# Altium PCB energy_harvesting_board.PcbDoc
Units mm, origin at the board's own origin, x right, y up, seen from the top; angles counter-clockwise.
Board outline 152.4 x 101.6 mm, 18 copper layers (F.Cu, F.Mask, B.Cu, B.Mask, F.SilkS, B.SilkS, F.Adhes, B.Adhes, F.Paste, B.Paste, Dwgs.User, Cmts.User, Eco1.User, Eco2.User, Edge.Cuts, Margin, B.CrtYd, F.CrtYd); 38 components, 22 nets, 126 pads, 53 vias.
Unrouted connection lines stored in the file: 67.
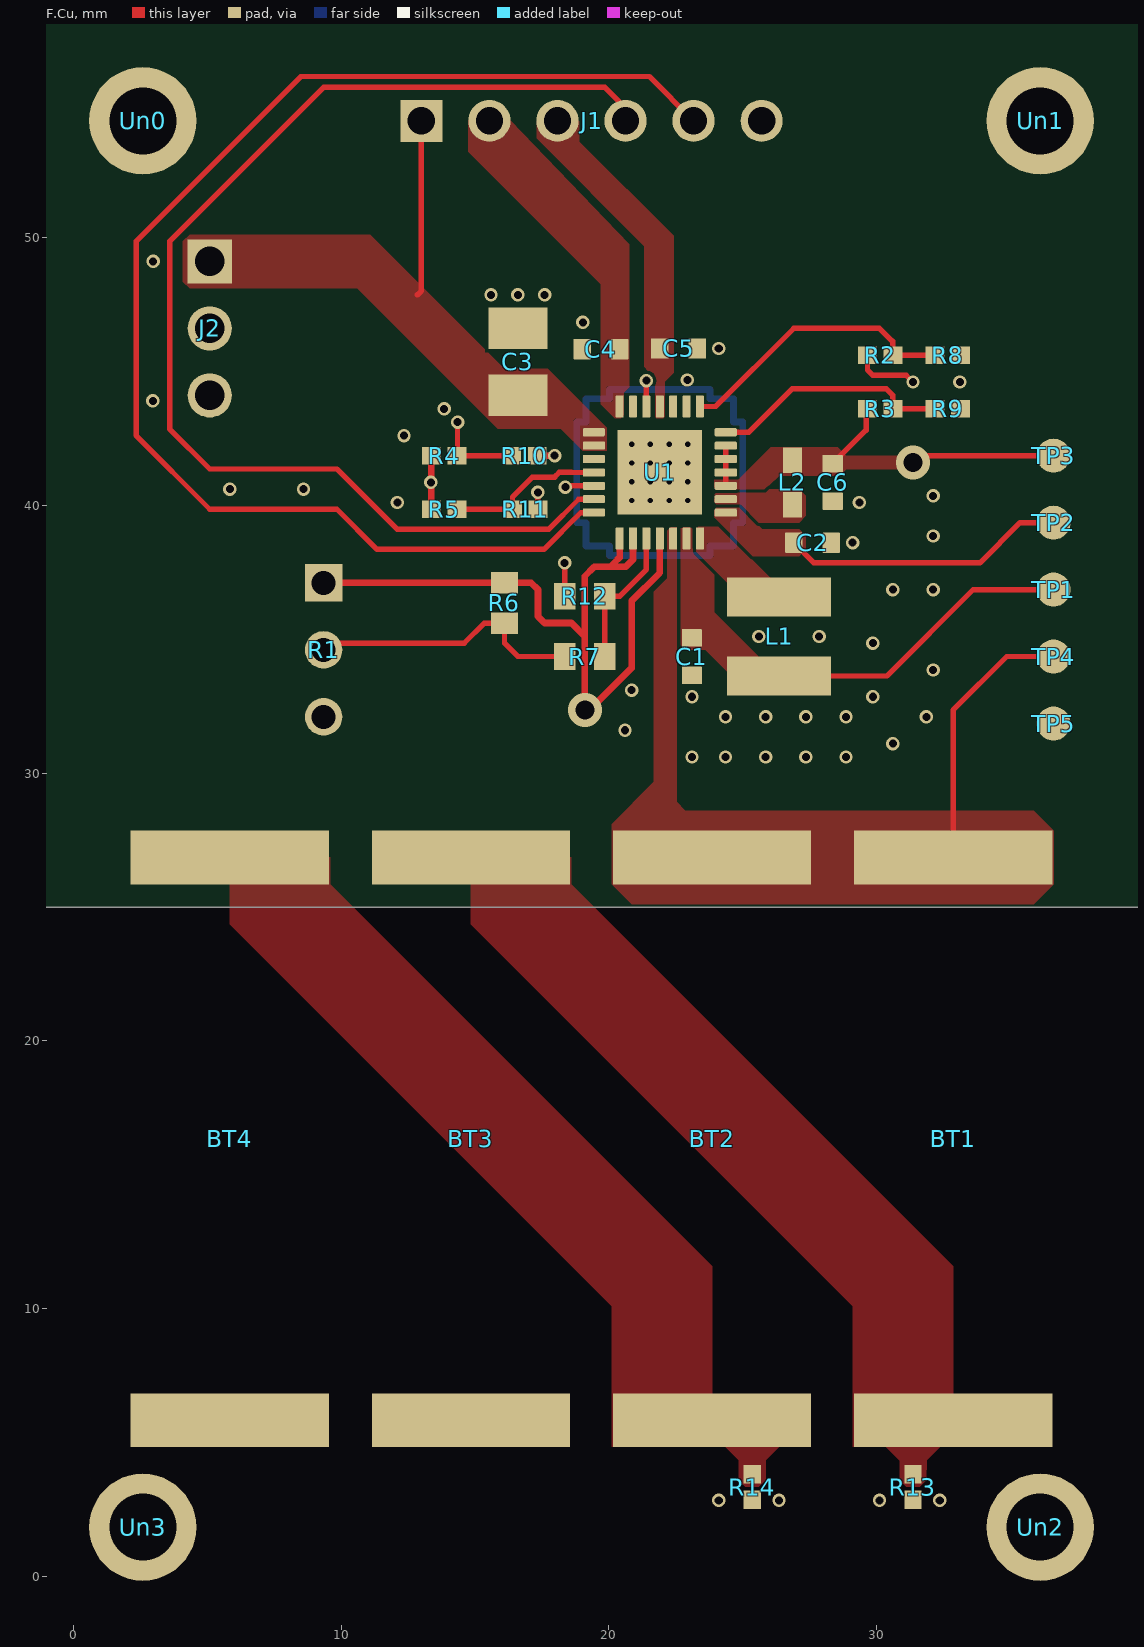
[diagram p0: F.Cu view]
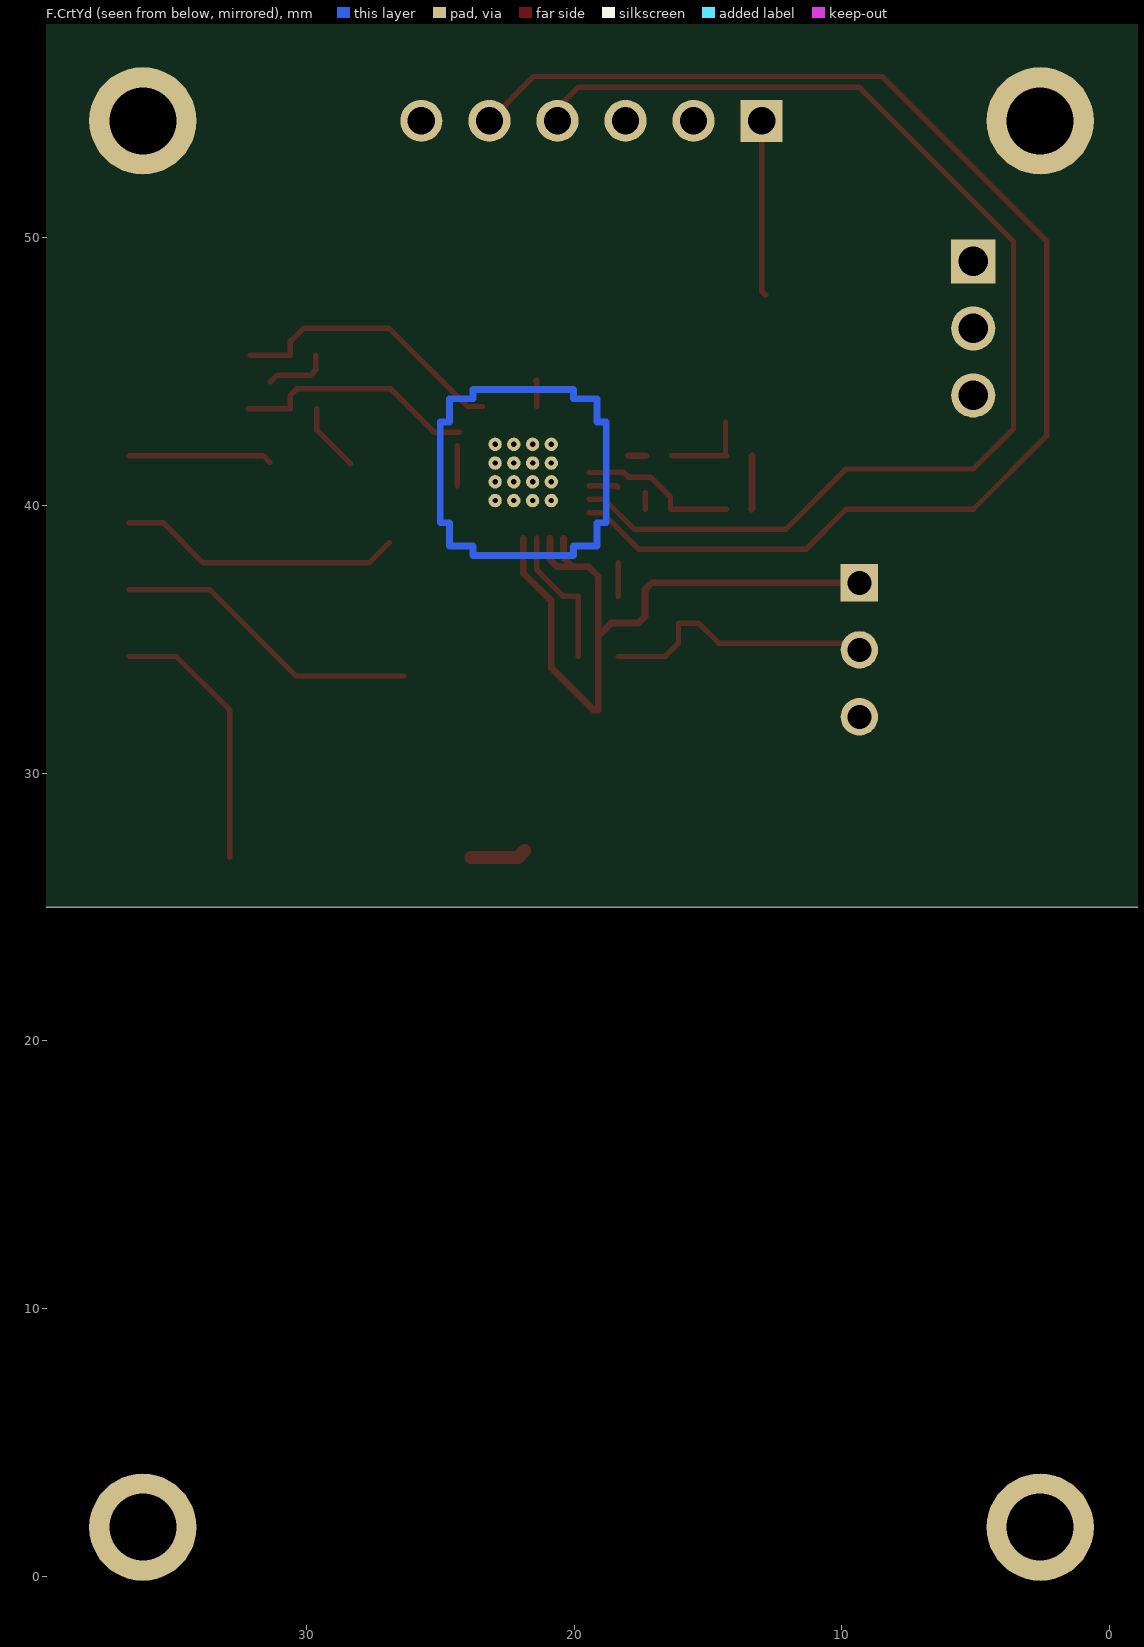
[diagram p1: F.CrtYd view, seen from below]
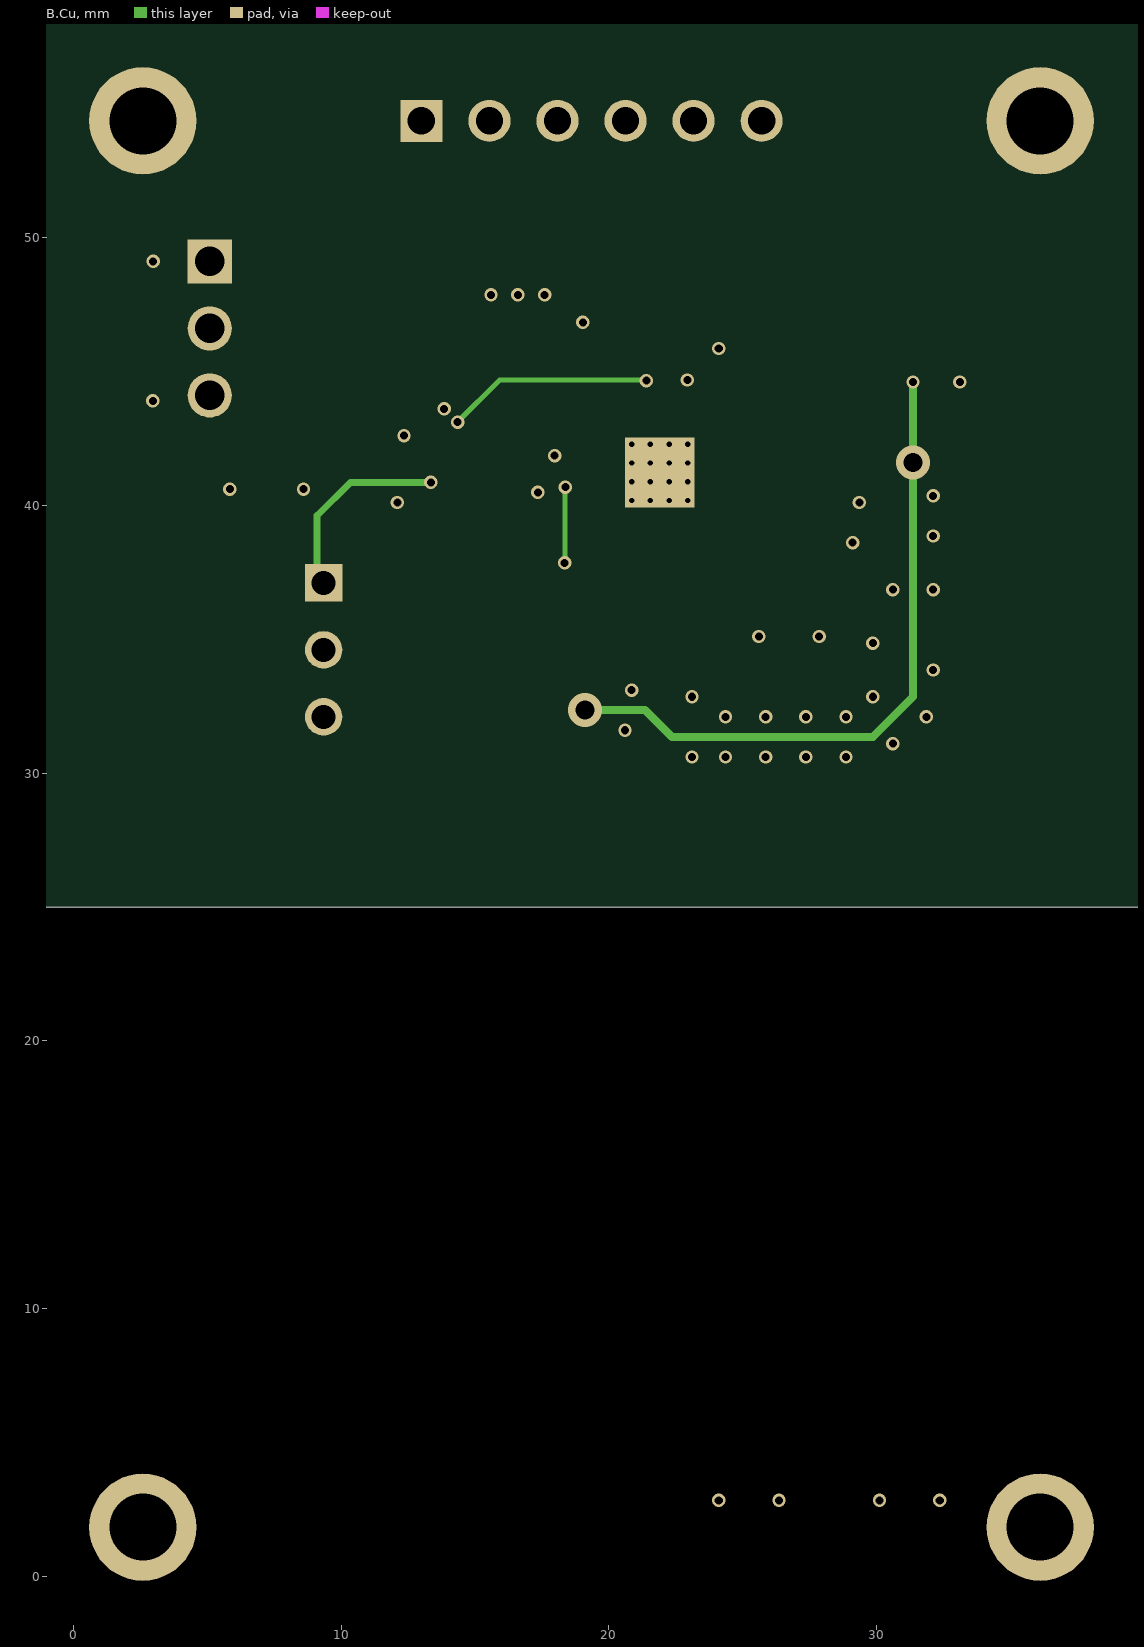
[diagram p2: B.Cu]
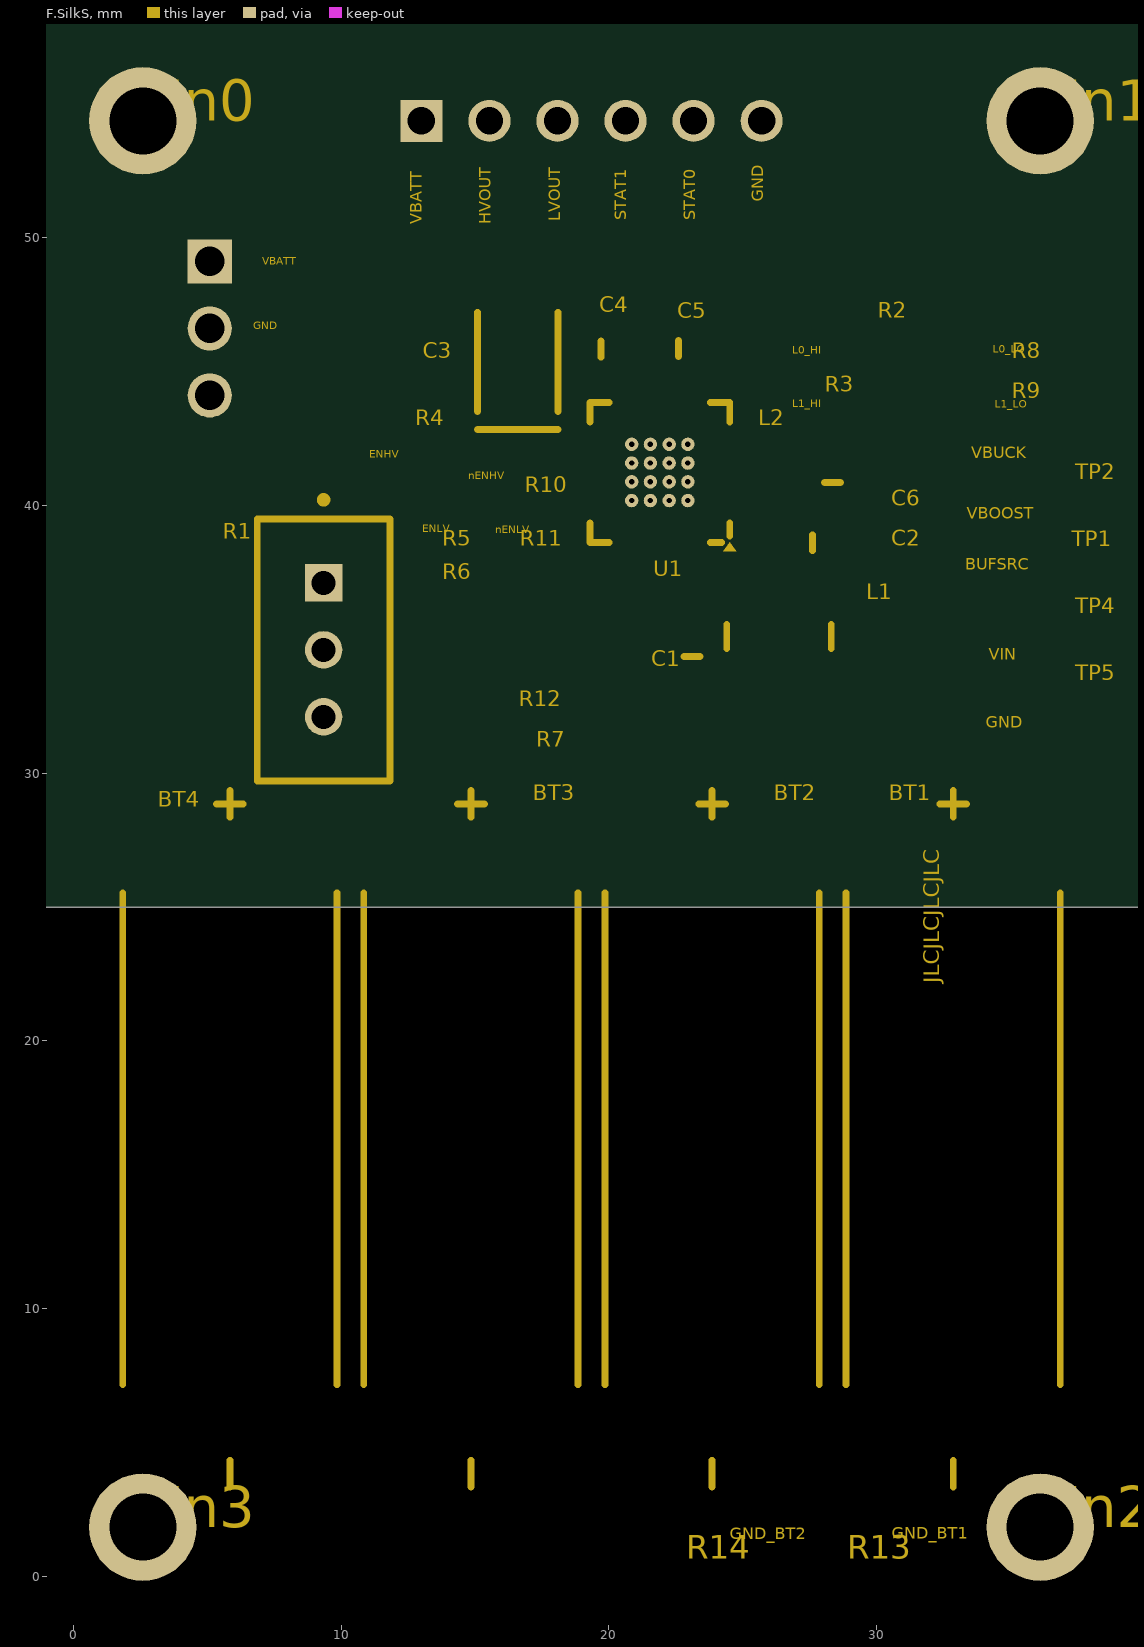
[diagram p3: F.SilkS]
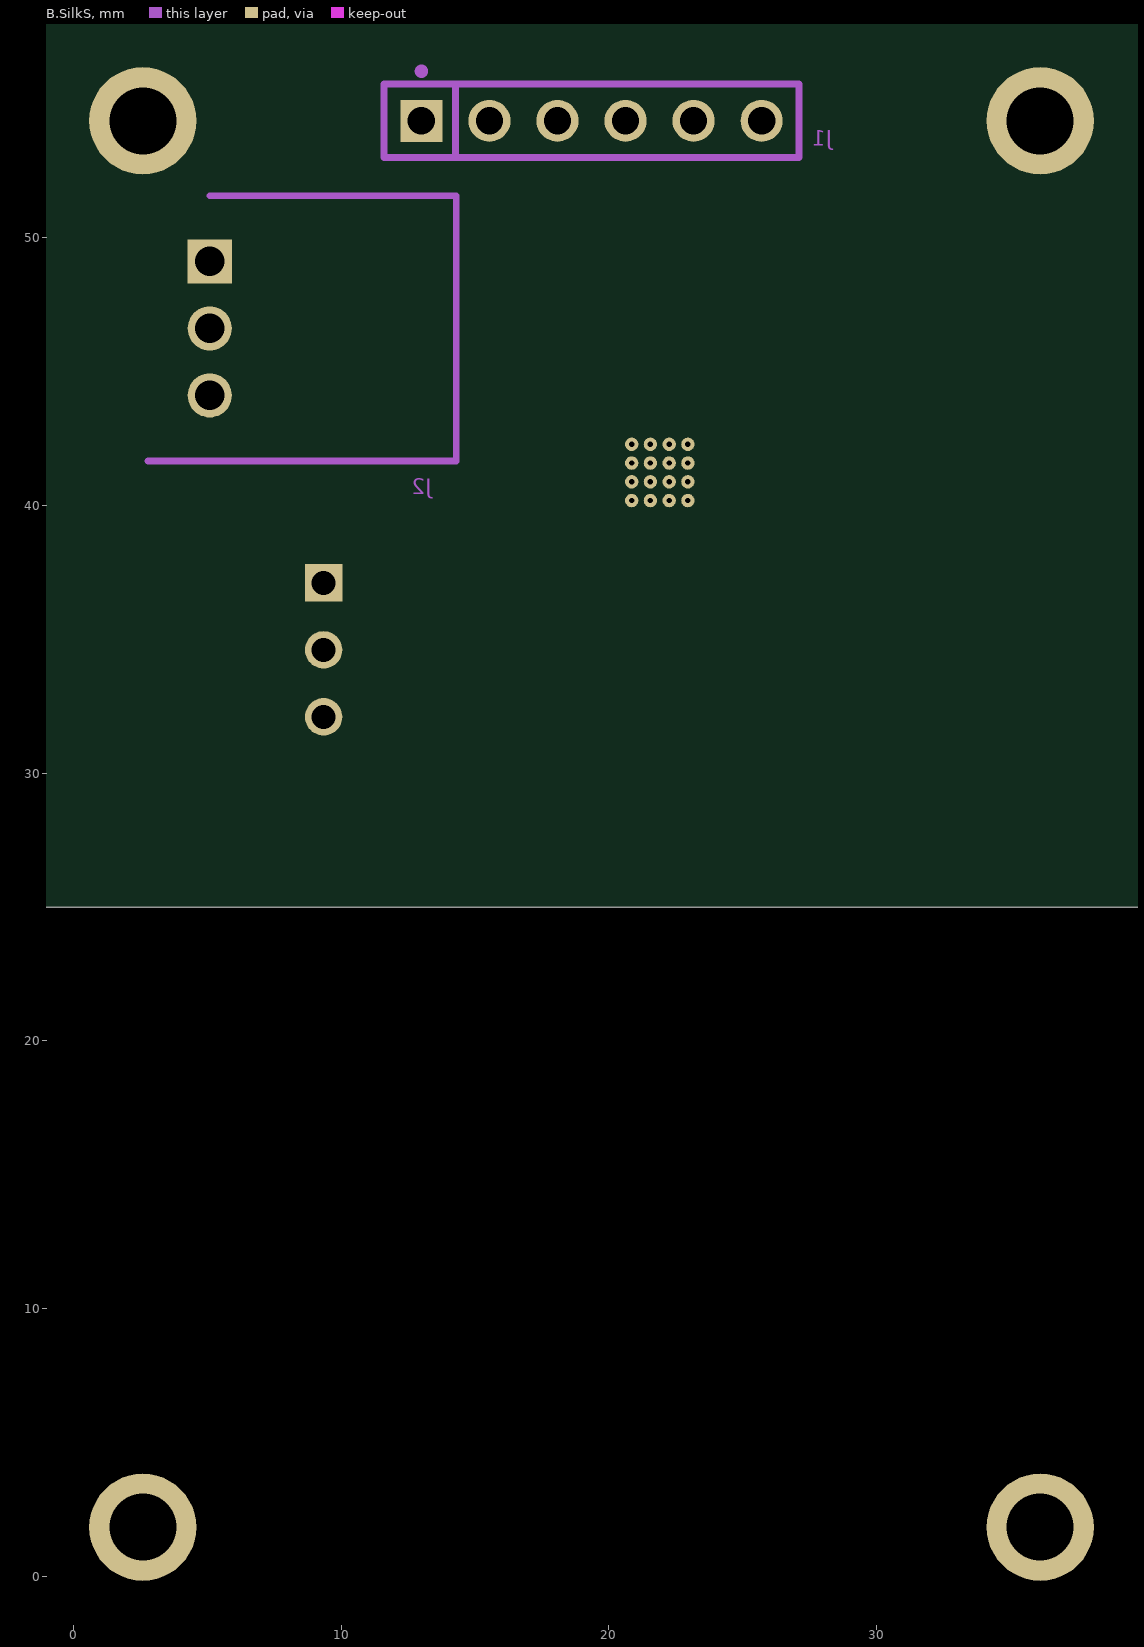
[diagram p4: B.SilkS]
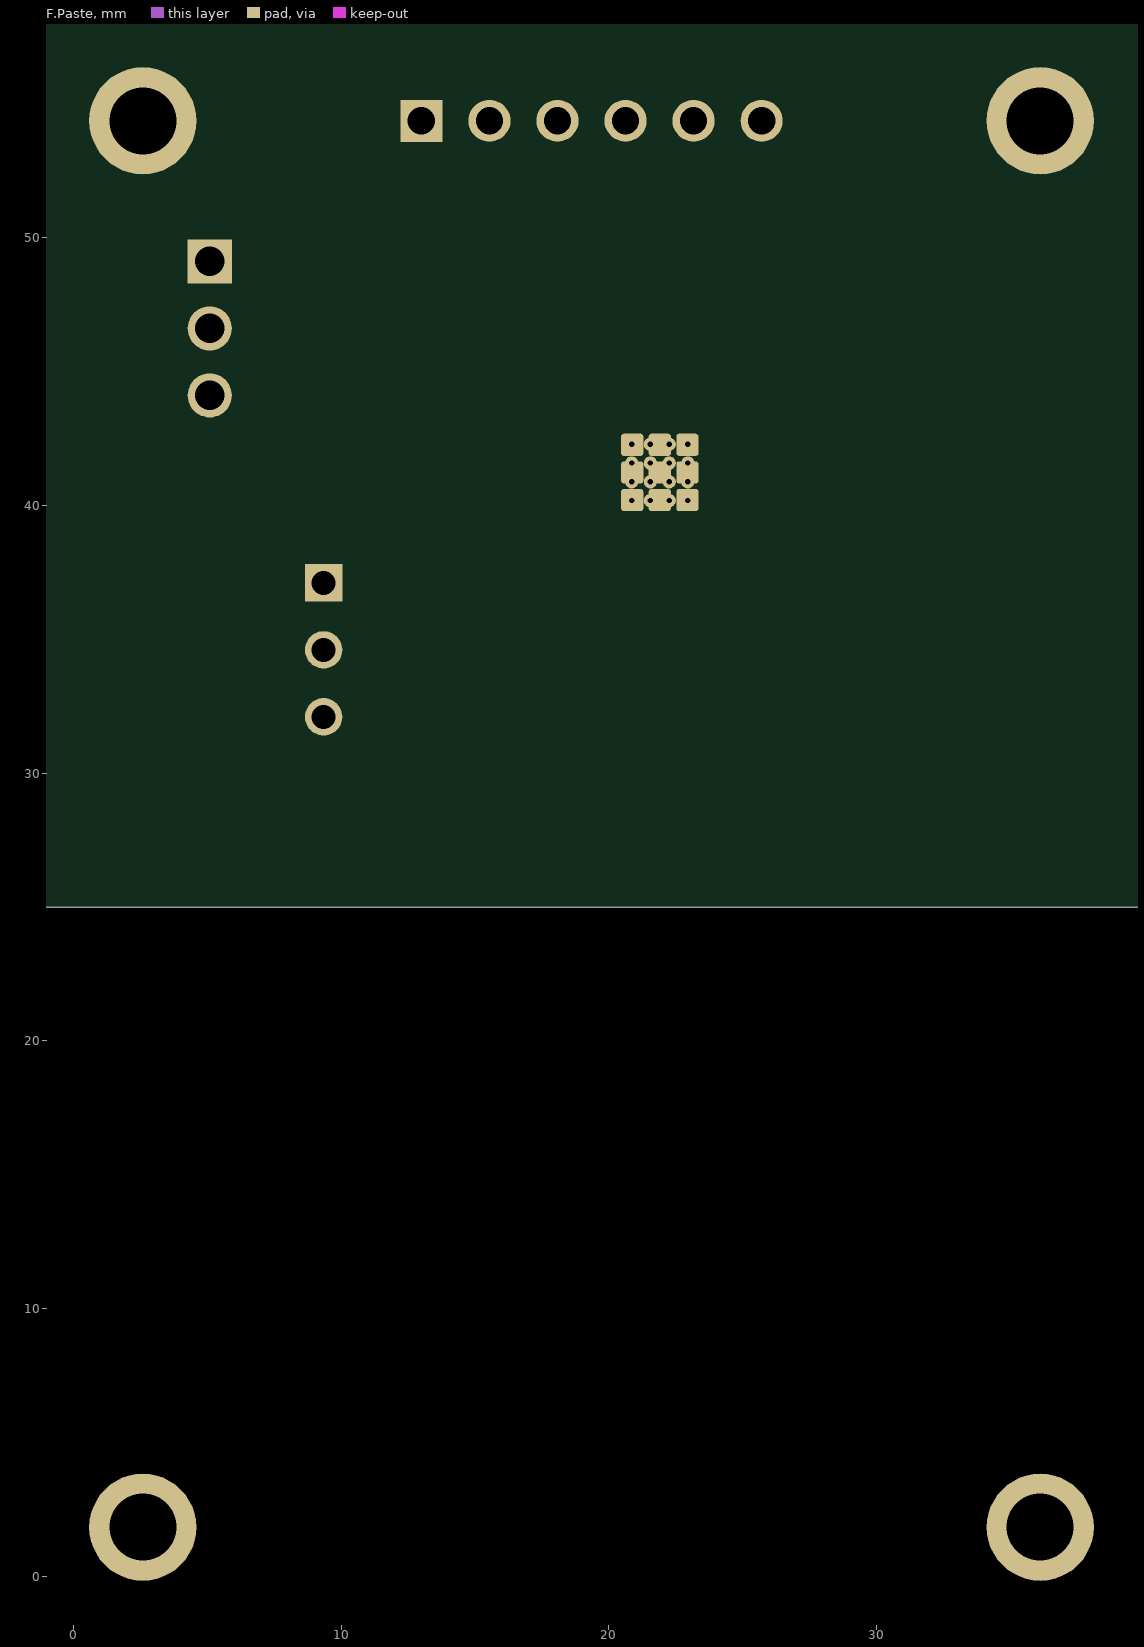
[diagram p5: F.Paste]
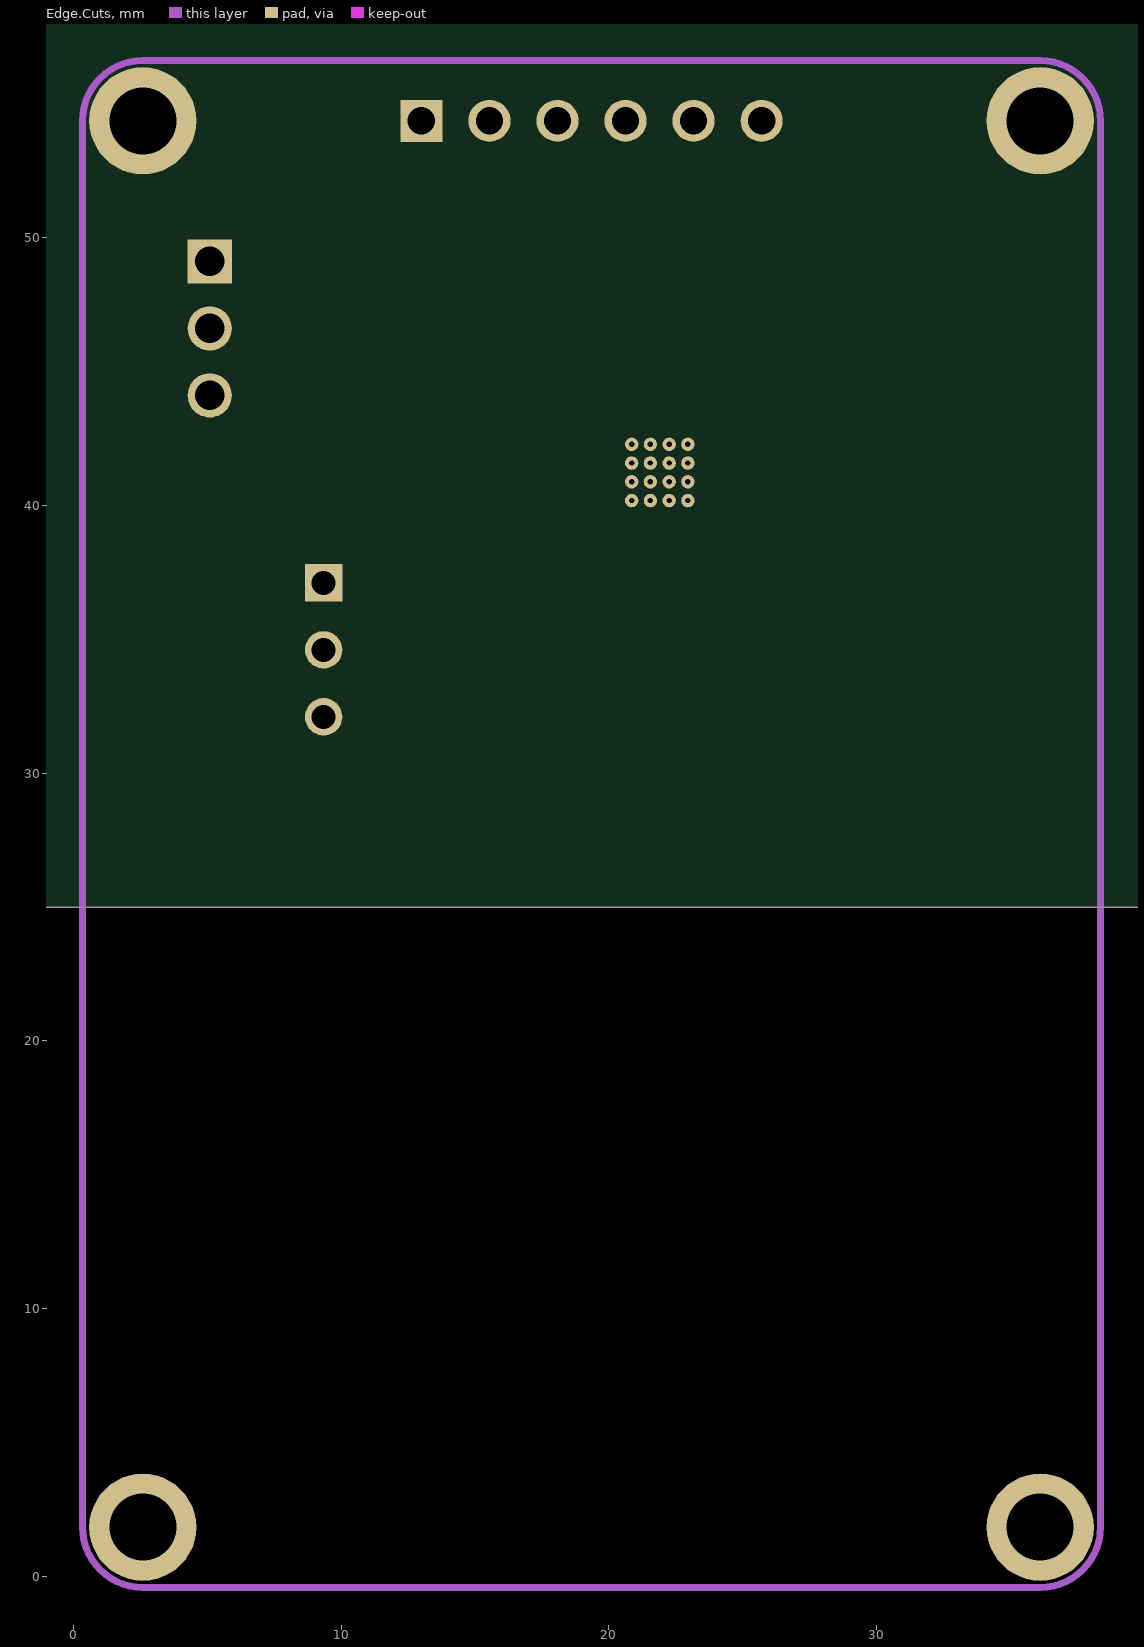
[diagram p6: Edge.Cuts]

## Layer stack, top to bottom
Top Solder: solder mask 0.0102, Solder Resist, Dk 3.5
F.Cu: signal copper 0.0356
Dielectric 1: dielectric 0.32, FR-4, Dk 4.8
F.Mask: signal copper 0.0356
Dielectric2: dielectric 0.32, FR-4, Dk 4.8
B.Cu: signal copper 0.0356
Dielectric3: dielectric 0.32, FR-4, Dk 4.8
B.Mask: signal copper 0.0356
Dielectric4: dielectric 0.32, FR-4, Dk 4.8
F.SilkS: signal copper 0.0356
Dielectric5: dielectric 0.32, FR-4, Dk 4.8
B.SilkS: signal copper 0.0356
Dielectric6: dielectric 0.32, FR-4, Dk 4.8
F.Adhes: signal copper 0.0356
Dielectric7: dielectric 0.32, FR-4, Dk 4.8
B.Adhes: signal copper 0.0356
Dielectric8: dielectric 0.32, FR-4, Dk 4.8
F.Paste: signal copper 0.0356
Dielectric9: dielectric 0.32, FR-4, Dk 4.8
B.Paste: signal copper 0.0356
Dielectric10: dielectric 0.32, FR-4, Dk 4.8
Dwgs.User: signal copper 0.0356
Dielectric11: dielectric 0.32, FR-4, Dk 4.8
Cmts.User: signal copper 0.0356
Dielectric12: dielectric 0.32, FR-4, Dk 4.8
Eco1.User: signal copper 0.0356
Dielectric13: dielectric 0.32, FR-4, Dk 4.8
Eco2.User: signal copper 0.0356
Dielectric14: dielectric 0.32, FR-4, Dk 4.8
Edge.Cuts: signal copper 0.0356
Dielectric15: dielectric 0.32, FR-4, Dk 4.8
Margin: signal copper 0.0356
Dielectric16: dielectric 0.32, FR-4, Dk 4.8
B.CrtYd: signal copper 0.0356
Dielectric17: dielectric 0.32, FR-4, Dk 4.8
F.CrtYd: signal copper 0.0356
Bottom Solder: solder mask 0.0102, Solder Resist, Dk 3.5

## Board outline
-103.751,25 48.649,25 48.649,126.6 -103.751,126.6

## Design rules (kind name [scope] priority, off if disabled: settings)
Clearance "Clearence 0.127_Polygon" [InNamedPolygon('F.Cu-NetC1_1') OR InNamedPolygon('F.Cu-NetBT2_N') OR InNamedPolygon('F.Cu-NetBT1_N') OR InNamedPolygon('F.Cu-NetL1_1') OR InNamedPolygon('F.Cu-NetBT2_N-1') OR InNamedPolygon('F.Cu-NetC2_1') OR InNamedPolygon('F.Cu-V_IN') OR InNamedPolygon('F.Cu-NetL2_1') OR InNamedPolygon('F.Cu-LVOUT') OR InNamedPolygon('F.Cu-VBATT') OR InNamedPolygon('F.Cu-VBUCK') OR InNamedPolygon('F.Cu-GND') OR InNamedPolygon('F.Cu-HVOUT') OR InNamedPolygon('F.Cu-NetBT1_N-1') OR InNamedPolygon('F.Cu-V_IN-1') OR InNamedPolygon('B.Cu-GND')] p1: gap=0.127 ignorepadtopadclearanceinfootprint=FALSE
Clearance "Clearence 0.127_PadClass" [InPadClass('Pad Class Clearance 0.127')] p2: gap=0.127 ignorepadtopadclearanceinfootprint=FALSE
MinimumSolderMaskSliver [All] p1: minsoldermaskwidth=0
PolygonConnect Polygon_B.Cu-GND_ConnectDirect [IsNamedPolygon('B.Cu-GND') vs IsVia] p1: connectstyle=Direct reliefconductorwidth=0.254 reliefentries=4 polygonreliefangle="90 Angle" airgapwidth=0.254
PolygonConnect Polygon_B.Cu-GND_ConnectRelief45 [IsNamedPolygon('B.Cu-GND') vs (IsThruPin or IsSMTPin) and (PadShape_AllLayers = 'Round')] p2: connectstyle=Relief reliefconductorwidth=0.254 reliefentries=4 polygonreliefangle="45 Angle" airgapwidth=0.254
PolygonConnect Polygon_B.Cu-GND_ConnectRelief90 [IsNamedPolygon('B.Cu-GND') vs (IsThruPin or IsSMTPin) and (PadShape_AllLayers <> 'Round')] p3: connectstyle=Relief reliefconductorwidth=0.254 reliefentries=4 polygonreliefangle="90 Angle" airgapwidth=0.254
PolygonConnect Polygon_F.Cu-V_IN-1_ConnectDirect [IsNamedPolygon('F.Cu-V_IN-1')] p4: connectstyle=Direct reliefconductorwidth=0.254 reliefentries=4 polygonreliefangle="90 Angle" airgapwidth=0.254
PolygonConnect Polygon_F.Cu-NetBT1_N-1_ConnectDirect [IsNamedPolygon('F.Cu-NetBT1_N-1')] p5: connectstyle=Direct reliefconductorwidth=0.254 reliefentries=4 polygonreliefangle="90 Angle" airgapwidth=0.254
PolygonConnect Polygon_F.Cu-HVOUT_ConnectDirect [IsNamedPolygon('F.Cu-HVOUT')] p6: connectstyle=Direct reliefconductorwidth=0.254 reliefentries=4 polygonreliefangle="90 Angle" airgapwidth=0.254
PolygonConnect Polygon_F.Cu-GND_ConnectDirect [IsNamedPolygon('F.Cu-GND') vs IsVia] p7: connectstyle=Direct reliefconductorwidth=0.254 reliefentries=4 polygonreliefangle="90 Angle" airgapwidth=0.254
PolygonConnect Polygon_F.Cu-GND_ConnectRelief45 [IsNamedPolygon('F.Cu-GND') vs (IsThruPin or IsSMTPin) and (PadShape_AllLayers = 'Round')] p8: connectstyle=Relief reliefconductorwidth=0.254 reliefentries=4 polygonreliefangle="45 Angle" airgapwidth=0.254
PolygonConnect Polygon_F.Cu-GND_ConnectRelief90 [IsNamedPolygon('F.Cu-GND') vs (IsThruPin or IsSMTPin) and (PadShape_AllLayers <> 'Round')] p9: connectstyle=Relief reliefconductorwidth=0.254 reliefentries=4 polygonreliefangle="90 Angle" airgapwidth=0.254
PolygonConnect Polygon_F.Cu-VBUCK_ConnectDirect [IsNamedPolygon('F.Cu-VBUCK')] p10: connectstyle=Direct reliefconductorwidth=0.254 reliefentries=4 polygonreliefangle="90 Angle" airgapwidth=0.254
PolygonConnect Polygon_F.Cu-VBATT_ConnectDirect [IsNamedPolygon('F.Cu-VBATT')] p11: connectstyle=Direct reliefconductorwidth=0.254 reliefentries=4 polygonreliefangle="90 Angle" airgapwidth=0.254
PolygonConnect Polygon_F.Cu-LVOUT_ConnectDirect [IsNamedPolygon('F.Cu-LVOUT')] p12: connectstyle=Direct reliefconductorwidth=0.254 reliefentries=4 polygonreliefangle="90 Angle" airgapwidth=0.254
PolygonConnect Polygon_F.Cu-NetL2_1_ConnectDirect [IsNamedPolygon('F.Cu-NetL2_1')] p13: connectstyle=Direct reliefconductorwidth=0.254 reliefentries=4 polygonreliefangle="90 Angle" airgapwidth=0.254
PolygonConnect Polygon_F.Cu-V_IN_ConnectDirect [IsNamedPolygon('F.Cu-V_IN')] p14: connectstyle=Direct reliefconductorwidth=0.254 reliefentries=4 polygonreliefangle="90 Angle" airgapwidth=0.254
PolygonConnect Polygon_F.Cu-NetC2_1_ConnectDirect [IsNamedPolygon('F.Cu-NetC2_1')] p15: connectstyle=Direct reliefconductorwidth=0.254 reliefentries=4 polygonreliefangle="90 Angle" airgapwidth=0.254
PolygonConnect Polygon_F.Cu-NetBT2_N-1_ConnectDirect [IsNamedPolygon('F.Cu-NetBT2_N-1')] p16: connectstyle=Direct reliefconductorwidth=0.254 reliefentries=4 polygonreliefangle="90 Angle" airgapwidth=0.254
PolygonConnect Polygon_F.Cu-NetL1_1_ConnectDirect [IsNamedPolygon('F.Cu-NetL1_1')] p17: connectstyle=Direct reliefconductorwidth=0.254 reliefentries=4 polygonreliefangle="90 Angle" airgapwidth=0.254
PolygonConnect Polygon_F.Cu-NetBT1_N_ConnectDirect [IsNamedPolygon('F.Cu-NetBT1_N')] p18: connectstyle=Direct reliefconductorwidth=0.254 reliefentries=4 polygonreliefangle="90 Angle" airgapwidth=0.254
PolygonConnect Polygon_F.Cu-NetBT2_N_ConnectDirect [IsNamedPolygon('F.Cu-NetBT2_N')] p19: connectstyle=Direct reliefconductorwidth=0.254 reliefentries=4 polygonreliefangle="90 Angle" airgapwidth=0.254
PolygonConnect Polygon_F.Cu-NetC1_1_ConnectDirect [IsNamedPolygon('F.Cu-NetC1_1')] p20: connectstyle=Direct reliefconductorwidth=0.254 reliefentries=4 polygonreliefangle="90 Angle" airgapwidth=0.254
RoutingVias [All] p1: holewidth=0.711 width=1.27 viastyle="Through Hole" minholewidth=0.711 minwidth=1.27 maxholewidth=0.711 maxwidth=1.27
SilkToSilkClearance [All] p1: silktosilkclearance=0
SilkToSolderMaskClearance [IsPad] p1: minsilkscreentomaskgap=0 clearancetoexposedcopper=TRUE
SolderMaskExpansion [All] p1: expansion=0.102 istentingtop=FALSE
Width [All] p1: maxlimit=10 minlimit=0.254 preferedwidth=0.254 midlayer1_maxwidth=0.254 midlayer3_maxwidth=0.254 midlayer9_maxwidth=0.254 midlayer11_maxwidth=0.254 midlayer13_maxwidth=0.254 midlayer15_maxwidth=0.254 midlayer17_maxwidth=0.254 midlayer19_maxwidth=0.254 midlayer21_maxwidth=0.254 midlayer23_maxwidth=0.254 midlayer27_maxwidth=0.254 midlayer29_maxwidth=0.254 minimp=50.000000 maximp=50.000000 favimp=50.000000
27 further rules are at their usual default settings.

## Classes and differential pairs
pad class "Pad Class Clearance 0.127": R1-2

## Components (designator, comment, footprint, x,y, rotation, side; value= is the part's Value field where it differs from the comment)
BT1 "Comment" SOLAR_KXOB25-14X1F-TR 32.85,16.35 r270 top value=KXOB25-05X3F-TR
BT2 "Comment" SOLAR_KXOB25-14X1F-TR 23.85,16.35 r270 top value=KXOB25-05X3F-TR
BT3 "Comment" SOLAR_KXOB25-14X1F-TR 14.85,16.35 r270 top value=KXOB25-05X3F-TR
BT4 "Comment" SOLAR_KXOB25-14X1F-TR 5.85,16.35 r270 top value=KXOB25-05X3F-TR
C1 "Comment" CAPC0603(1608)100_L 23.1,34.35 r270 top value="Capacitor 10µF +/-20% 10V 0603"
C2 "Comment" CAPC0603(1608)100_L 27.6,38.6 r0 top value="Capacitor 10µF +/-20% 10V 0603"
C3 "Comment" AVX-TAJ-B-2_L 16.6,45.35 r90 top value=TAJB106K016RNJ
C4 "Comment" CAPC0603(1608)100_L 19.7,45.825 r180 top value="Capacitor 10µF +/-20% 10V 0603"
C5 "Comment" CAPC0603(1608)100_L 22.6,45.85 r180 top value="Capacitor 10µF +/-20% 10V 0603"
C6 "Comment" CAPC0603(1608)100_L 28.35,40.85 r90 top value="Capacitor 10µF +/-20% 10V 0603"
J1 "Comment" FP-22-28-4063-MFG 19.35,54.35 r0 top value=22-28-4063
J2 "Comment" SHDRRA3W64P0X250_1X3_990X1150X610P 5.1,49.1 r90 top value=S3B-XH-A__LF__SN_
L1 "Comment" LPS4018223MRC 26.35,35.1 r270 top value=22µH
L2 "Comment" MURA-BLM18-F-H1-CHIP-2_V 26.85,40.85 r90 top value=10µH
R1 "Comment" FP-PV36W-MFG 9.35,34.6 r90 top value="100k POT"
R2 "Comment" RESC1005X40X25ML05T10 30.125,45.6 r180 top value="Resistor 0R 0402 63 mW"
R3 "Comment" RESC1005X40X25ML05T10 30.125,43.6 r180 top value="Resistor 0R 0402 63 mW"
R4 "Comment" RESC1005X40X25ML05T10 13.85,41.85 r180 top value="Resistor 0R 0402 63 mW"
R5 "Comment" RESC1005X40X25ML05T10 13.85,39.85 r180 top value="Resistor 0R 0402 63 mW"
R6 "Comment" RESC1608X55X25ML10T15 16.1,36.35 r90 top value="Resistor 0R +/- 5% 0603 100 mW"
R7 "Comment" RESC1608X55X25ML10T15 19.1,34.35 r180 top value="Resistor 0R +/- 5% 0603 100 mW"
R8 "Comment" RESC1005X40X25ML05T10 32.65,45.6 r180 top value="Resistor 0R 0402 63 mW"
R9 "Comment" RESC1005X40X25ML05T10 32.65,43.6 r180 top value="Resistor 0R 0402 63 mW"
R10 "Comment" RESC1005X40X25ML05T10 16.85,41.85 r180 top value="Resistor 0R 0402 63 mW"
R11 "Comment" RESC1005X40X25ML05T10 16.875,39.85 r180 top value="Resistor 0R 0402 63 mW"
R12 "Comment" RESC1608X55X25ML10T15 19.1,36.6 r0 top value="Resistor 0R +/- 5% 0603 100 mW"
R13 "Comment" RESC1005X40X25ML05T10 31.35,3.35 r270 top value="Resistor 0R 0402 63 mW"
R14 "Comment" RESC1005X40X25ML05T10 25.35,3.35 r270 top value="Resistor 0R 0402 63 mW"
TP1 "Comment" TP06R 36.6,36.85 r90 top value=TPAD6R
TP2 "Comment" TP06R 36.6,39.35 r90 top value=TPAD6R
TP3 "Comment" TP06R 36.6,41.85 r90 top value=TPAD6R
TP4 "Comment" TP06R 36.6,34.35 r90 top value=TPAD6R
TP5 "Comment" TP06R 36.6,31.85 r90 top value=TPAD6R
U1 "Comment" QFN-28-1EP_5x5mm_P0.5mm_EP3.1x3.1mm_ThermalVias 21.899,41.224 r180 top value=AEM00940
Un0 "Comment" ?#1 2.6,54.35 r0 top
Un1 "Comment" ?#2 36.1,54.35 r0 top
Un2 "Comment" ?#3 36.1,1.85 r0 top
Un3 "Comment" ?#4 2.6,1.85 r0 top

## Footprints (in the part's own frame and the unit in brackets; to place one, negate y for a bottom-side part, rotate by r counter-clockwise, add the part's x,y. Pads: shape width x height; smd on the part's side, far side on the other; paste and mask are expansions set on the pad)
AVX-TAJ-B-2_L [mm]
  rect 1.55x2.2 smd paste-2.2 mask-2.2: 1(-1.25,0) 2(1.25,0)
  F.SilkS lines w0.254: -2.525,1.5 -2.525,-1.5 ; -1.85,1.5 1.85,1.5 ; -1.85,-1.5 1.85,-1.5
CAPC0603(1608)100_L [mm]
  rrect12% 0.66x0.76 smd paste-0.76 mask-0.76: 1(-0.7,0) 2(0.7,0)
  F.SilkS lines w0.254: 0,-0.3 0,0.3
FP-22-28-4063-MFG [mm]
  rect 1.57x1.57 hole 1.02 paste-2539.97 mask-1.57: 1(-6.35,0)
  round 1.57 hole 1.02 paste-2539.97 mask-1.57: 2(-3.81,0) 3(-1.27,0) 4(1.27,0) 5(3.81,0) 6(6.35,0)
  B.SilkS circle w0.254: c-6.35,1.85 r0.125
  B.SilkS lines w0.254: -5.08,-1.37 -5.08,1.37 ; -7.745,-1.37 -7.745,1.37 7.745,1.37 7.745,-1.37 -7.745,-1.37
FP-PV36W-MFG [mm]
  rect 1.4x1.4 hole 0.9 paste-2539.97 mask-1.4: 1(2.5,0)
  round 1.4 hole 0.9 paste-2539.97 mask-1.4: 2(0,0) 3(-2.5,0)
  F.SilkS circle w0.254: c5.6,0 r0.125
  F.SilkS lines w0.254: -4.89,2.48 4.89,2.48 4.89,-2.48 -4.89,-2.48 -4.89,2.48
LPS4018223MRC [mm]
  rect 1.45x3.89 smd paste-3.89 mask-3.89: 1(-1.475,0) 2(1.475,0)
  F.SilkS lines w0.254: 0.45,-1.95 -0.45,-1.95 ; 0.45,1.95 -0.45,1.95
MURA-BLM18-F-H1-CHIP-2_V [mm]
  rect 0.95x0.7 smd paste-0.95 mask-0.95: 1(-0.825,0) 2(0.825,0)
QFN-28-1EP_5x5mm_P0.5mm_EP3.1x3.1mm_ThermalVias [mm]
  rrect25% 0.825x0.3 smd paste-0.825 mask-0.825: 1(-2.462,1.5) 2(-2.462,1) 3(-2.462,0.5) 4(-2.462,0) 5(-2.462,-0.5) 6(-2.462,-1) 7(-2.462,-1.5) 15(2.462,-1.5) 16(2.462,-1) 17(2.462,-0.5) 18(2.462,0) 19(2.462,0.5) 20(2.462,1) 21(2.462,1.5)
  rrect25% 0.3x0.825 smd paste-0.825 mask-0.825: 8(-1.5,-2.462) 9(-1,-2.462) 10(-0.5,-2.462) 11(0,-2.462) 12(0.5,-2.462) 13(1,-2.462) 14(1.5,-2.462) 22(1.5,2.462) 23(1,2.462) 24(0.5,2.462) 25(0,2.462) 26(-0.5,2.462) 27(-1,2.462) 28(-1.5,2.462)
  round 0.5 hole 0.2 paste-2539.97 mask-0.5: 29(-1.05,1.05) 29(-1.05,-0.35) 29(-1.05,0.35) 29(-1.05,-1.05) 29(-0.35,1.05) 29(-0.35,0.35) 29(-0.35,-0.35) 29(-0.35,-1.05) 29(0.35,1.05) 29(0.35,0.35) 29(0.35,-0.35) 29(0.35,-1.05) 29(1.05,1.05) 29(1.05,-0.35) 29(1.05,0.35) 29(1.05,-1.05)
  rect 3.15x3.15 smd paste-3.15 mask-3.15: 29(0,0)
  rect 2.6x2.6 on Mid2 paste-2.6 mask-2.6: 29(0,0)
  rrect25% 0.83x0.83 on Mid13 paste-0.83 mask-0.83: Un1(-1.03,1.03) Un2(-1.03,0) Un3(-1.03,-1.03) Un4(0,1.03) Un5(0,0) Un6(0,-1.03) Un7(1.03,1.03) Un8(1.03,0) Un9(1.03,-1.03)
  F.SilkS region: -2.61,2.61 -2.85,2.94 -2.37,2.94
  F.SilkS lines w0.254: 2.61,1.885 2.61,2.61 1.885,2.61 ; 2.61,-1.885 2.61,-2.61 1.885,-2.61 ; -1.885,2.61 -2.31,2.61 ; -1.885,-2.61 -2.61,-2.61 -2.61,-1.885 ; -2.61,2.37 -2.61,1.885
  F.CrtYd lines w0.254: 3.1,1.88 3.1,-1.88 2.75,-1.88 2.75,-2.75 1.88,-2.75 1.88,-3.1 -1.88,-3.1 -1.88,-2.75 -2.75,-2.75 -2.75,-1.88 -3.1,-1.88 -3.1,1.88 -2.75,1.88 -2.75,2.75 -1.88,2.75 -1.88,3.1 1.88,3.1 1.88,2.75 2.75,2.75 2.75,1.88 3.1,1.88
RESC1005X40X25ML05T10 [mm]
  rect 0.7x0.65 smd paste-0.7 mask-0.7: 1(-0.475,0) 2(0.475,0)
RESC1608X55X25ML10T15 [mm]
  rect 0.8x1 smd paste-1 mask-1: 1(-0.75,0) 2(0.75,0)
SHDRRA3W64P0X250_1X3_990X1150X610P [mm]
  rect 1.65x1.65 hole 1.1 paste-2539.97 mask-1.65: 1(0,0)
  round 1.65 hole 1.1 paste-2539.97 mask-1.65: 2(-2.5,0) 3(-5,0)
  B.SilkS lines w0.254: -7.45,2.3 -7.45,-9.2 2.45,-9.2 2.45,0
SOLAR_KXOB25-14X1F-TR [mm]
  rect 2x7.4 smd paste-7.4 mask-7.4: N(10.5,0) P(-10.5,0)
  F.SilkS lines w0.254: 9.185,-4 -9.185,-4 ; -12.5,-0.5 -12.5,0.5 ; 13,0 12,0 ; -12,0 -13,0 ; 9.185,4 -9.185,4
TP06R [mm]
  round 1.27 smd paste-1.27 mask-1.27: 1(0,0)
?#1 [mm]
  round 4 hole 2.5 paste-2539.97 mask-4: 3(0,0)
?#2 [mm]
  round 4 hole 2.5 paste-2539.97 mask-4: 4(0,0)
?#3 [mm]
  round 4 hole 2.5 paste-2539.97 mask-4: 2(0,0)
?#4 [mm]
  round 4 hole 2.5 paste-2539.97 mask-4: 1(0,0)

## Part data
BT1 BT2 BT3 BT4: library part SOLAR_KXOB25-14X1F-TR
C1 C2 C4 C5 C6: library part CAPC0603(1608)100_L
C3: library part AVX-TAJ-B-2_L
J1: library part FP-22-28-4063-MFG
J2: library part SHDRRA3W64P0X250_1X3_990X1150X610P
L1: library part LPS4018223MRC
L2: library part MURA-BLM18-F-H1-CHIP-2_V
R1: library part FP-PV36W-MFG
R2 R3 R4 R5 R8 R9 R10 R11 R13 R14: library part RESC1005X40X25ML05T10
R6 R7 R12: library part RESC1608X55X25ML10T15
TP1 TP2 TP3 TP4 TP5: library part TP06R
U1: library part QFN-28-1EP_5x5mm_P0.5mm_EP3.1x3.1mm_ThermalVias, "QFN, 28 Pin (https://www.analog.com/media/en/technical-documentation/data-sheets/TMC2202_TMC2208_TMC2224_datasheet_rev1.14.pdf#page=77), generated with kicad-footprint-generator ipc_noLead_generator.py", ki_fp_filters=*QFN40P400X400X85_HS-29N*

## Via types
v1: diameter 0.5, hole 0.3, F.Cu to B.Cu, tented both sides, 51 vias
v2: diameter 1.27, hole 0.711, F.Cu to B.Cu, tented both sides, 2 vias

## Nets (pads, with @x,y where several pads share a name; then routed paths per layer and width w, separated by ;. In a path a pad name is that pad's centre, name@x,y a point inside that pad or via, vN(x,y) a via of type N, cw(c..) or ccw(c..) an arc to the next point about the centre after c; other vN are vias at no path point)
ENHV: R4.1 R10.2 U1.12 | length 12
  F.Cu w0.2: R4.1 R4.1@14.35,41.85 ; v1(14.35,43.1) R4.1@14.35,41.85 ; R10.2@16.35,41.85 R4.1@14.35,41.85 ; U1.12 v1(21.4,44.65) 21.425,44.65 v1@21.4,44.675
  B.Cu w0.2: v1(14.35,43.1) 15.925,44.675 20.825,44.675 v1@21.4,44.675
ENLV: R5.1 R11.2 U1.18 | length 5.9
  F.Cu w0.2: R5.1 R11.2@16.35,39.85 ; R11.2 16.4,40.306 17.144,41.05 17.972,41.05 18.147,41.225 18.603,41.225 18.604,41.224 U1.18
GND: BT3.N BT4.N C1.2 C2.2 C3.2 C4.2 C5.1 C6.1 J1.6 J2.2 R8.1 R9.1 R10.1 R11.1 R13.2 R14.2 TP5.1 U1.9 U1.10 U1.17 U1.29 Un0.3 Un1.4 Un2.2 Un3.1 | length 1.3
  F.Cu w0.2: R11.1 v1(17.35,40.477)
  F.Cu w0.25: R10.1 v1(17.977,41.85)
  other v1: 24.1,2.85 26.35,2.85 30.1,2.85 32.35,2.85 23.1,30.6 24.35,30.6 25.85,30.6 27.35,30.6 28.85,30.6 30.6,31.1 20.6,31.6 24.35,32.1 25.85,32.1 27.35,32.1 28.85,32.1 31.85,32.1 23.1,32.85 29.85,32.85 20.85,33.1 32.1,33.85 29.85,34.85 25.6,35.1 27.85,35.1 30.6,36.85 32.1,36.85 29.1,38.6 32.1,38.85 12.1,40.1 29.35,40.1 32.1,40.35 5.85,40.6 8.6,40.6 12.35,42.6 13.85,43.6 2.978,43.894 33.1,44.6 22.925,44.675 24.1,45.85 19.025,46.825 15.6,47.85 16.6,47.85 17.6,47.85 2.984,49.103
HVOUT: C4.1 J1.2 U1.14
LVOUT: C5.2 J1.3 U1.11
NetBT1_N: BT1.N BT3.P R13.1
NetBT2_N: BT2.N BT4.P R14.1
NetC1_1: C1.1 L1.2 TP1.1 U1.27 | length 11.6
  F.Cu w0.2: L1.2 30.375,33.625 33.6,36.85 TP1.1
NetC2_1: C2.1 TP2.1 U1.1 | length 10.6
  F.Cu w0.2: C2.1 27.65,37.85 33.85,37.85 35.35,39.35 TP2.1
NetL1_1: L1.1 U1.28
NetL2_1: L2.1 U1.2
NetR1_2: R1.2 R6.1 R7.2 | length 10.3
  F.Cu w0.2: R1.2@9.35,34.85 14.6,34.85 15.35,35.6 R6.1 16.1,34.85 16.6,34.35 R7.2
SRC_LVL_D: R12.1 U1.19 | length 5.2
  F.Cu w0.2: R12.1 v1(18.35,37.85) ; v1(18.375,40.674) 18.425,40.724 U1.19
  B.Cu w0.2: v1(18.35,37.85) 18.362,37.862 18.362,40.66 v1@18.375,40.673
SRC_LVL_R0: R2.1 R8.2 U1.8 | length 10.6
  F.Cu w0.2: U1.8 23.986,43.686 26.9,46.6 30.1,46.6 30.586,46.114 30.6,46.114 R2.1 R8.2@32.1,45.6
SRC_LVL_R1: R3.1 R9.2 U1.7 | length 9.2
  F.Cu w0.2: U1.7@24.275,42.725 25.225,42.725 26.85,44.35 30.35,44.35 30.586,44.114 30.6,44.114 R3.1 R9.2
SRC_LVL_U: R7.1 R12.2 U1.24 | length 5.4
  F.Cu w0.2: R7.1 R12.2 20.4,36.6 21.4,37.6 21.4,38.048 21.399,38.049 U1.24
STATUS0: J1.5 U1.21 | length 50.7
  F.Cu w0.2: U1.21 18.949,39.724 17.575,38.35 11.35,38.35 9.85,39.85 5.1,39.85 2.35,42.6 2.35,49.85 8.501,56.001 21.509,56.001 J1.5
STATUS1: J1.4 U1.20 | length 45
  F.Cu w0.2: U1.20 18.874,40.224 17.75,39.1 12.1,39.1 9.85,41.35 5.1,41.35 3.6,42.85 3.6,49.85 9.35,55.6 19.85,55.6 20.6,54.85 J1.4@20.6,54.35
unconnected-(U1-FB_HV-Pad13): U1.13
V_IN: BT1.P BT2.P TP4.1 U1.26 | length 12.2
  F.Cu w0.2: BT1.P 32.85,32.35 34.85,34.35 TP4.1
  F.Cu w0.5: BT2.P@21.85,27.1 22.1,26.85 BT2.P
VBATT: C3.1 J1.1 J2.1 U1.15 U1.16 | length 6.9
  F.Cu w0.2: 12.85,47.85 13,48 J1.1@13,54.25 ; J1.1@12.85,54.1 J1.1@13,54.25 ; J1.1 J1.1@13,54.25 ; J1.1@13.1,54.35 J1.1@13,54.25
VBUCK: C6.2 L2.2 R1.1 R2.2 R3.2 R4.2 R5.2 R6.2 TP3.1 U1.3 U1.4 U1.5 U1.6 U1.22 U1.23 U1.25 | length 74.1
  F.Cu w0.2: U1.3 U1.6 ; C6.2 29.6,42.8 R3.2@29.6,43.6 ; R2.2 29.65,45.05 29.85,44.85 31.1,44.85 v1(31.35,44.6) ; v2(31.35,41.6) 31.6,41.85 TP3.1
  F.Cu w0.25: R1.1@9.1,37.1 R6.2 17.1,37.1 17.35,36.85 17.35,35.85 17.6,35.6 18.6,35.6 19.1,35.1 ; R4.2@13.35,41.85 13.363,41.838 13.363,40.862 v1(13.35,40.85) 13.363,40.838 13.363,39.863 R5.2 ; U1.22 20.399,38.049 20.2,37.85 20.05,37.7 ; U1.23 20.899,38.151 20.9,38.15 20.9,37.975 20.625,37.7 20.05,37.7 ; U1.25 21.899,37.474 20.85,36.425 20.85,33.925 19.275,32.35 v2(19.1,32.35) 19.1,37.35 19.45,37.7 20.05,37.7
  B.Cu w0.25: R1.1@9.1,37.35 9.1,39.625 9.125,39.625 10.35,40.85 v1(13.35,40.85)
  B.Cu w0.3: v2(19.1,32.35) 21.35,32.35 22.35,31.35 29.85,31.35 31.35,32.85 v2(31.35,41.6) v1(31.35,44.6)
pads on no net: J2.3 R1.3 U1.Un1 U1.Un2 U1.Un3 U1.Un4 U1.Un5 U1.Un6 U1.Un7 U1.Un8 U1.Un9
copper on no net: | length 186.1
  Edge.Cuts w0.254: 0.35,1.85 ccw(c2.6,1.85) 2.6,-0.4 36.1,-0.4 ccw(c36.1,1.85) 38.35,1.85 38.35,54.35 ccw(c36.1,54.35) 36.1,56.6 2.6,56.6 ccw(c2.6,54.35) 0.35,54.35 0.35,1.85

## Polygon pours and split planes (outlines as drawn)
V_IN on F.Cu "F.Cu-V_IN-1" (solid, remove dead copper, pour order 6): 22.175,39.05 22.3,39.175 22.525,39.175 22.525,35.425 22.175,35.425
NetBT1_N on F.Cu "F.Cu-NetBT1_N-1" (solid, remove dead copper, pour order 9): 30.85,3.6 31.1,3.35 31.6,3.35 31.847,3.597 31.856,4.344 32.35,4.837 32.35,5.587 30.35,5.587 30.35,4.837 30.85,4.337
HVOUT on F.Cu "F.Cu-HVOUT" (solid, remove dead copper, pour order 3): 14.75,54.375 16.325,54.375 20.75,49.75 20.75,44.4 20.55,44.2 20.55,43.35 20.45,43.25 20.225,43.25 19.7,43.775 19.7,48.25 14.75,53.2
VBUCK on F.Cu "F.Cu-VBUCK" (solid, remove dead copper, pour order 13): 28.85,41.85 31.6,41.85 31.6,41.35 28.85,41.35 28.6,41.1 26.35,41.1 25.801,40.551 23.926,40.551 23.939,40.953 24.828,40.953 26.04,42.165 28.535,42.165
VBATT on F.Cu "F.Cu-VBATT" (solid, remove dead copper, pour order 19): 19.025,42.025 18.2,42.85 16.1,42.85 15.85,42.85 10.6,48.1 4.35,48.1 4.1,48.35 4.1,49.85 4.35,50.1 11.1,50.1 16.1,45.1 17.725,45.1 19.925,42.9 19.925,42.025
LVOUT on F.Cu "F.Cu-LVOUT" (solid, remove dead copper, pour order 5): 21.725,43.3 21.775,43.25 22.025,43.25 22.075,43.3 22.075,44.6 22.425,44.95 22.425,50.05 18.9,53.575 18.9,54.325 18.875,54.35 17.3,54.35 17.3,53.7 21.325,49.675 21.325,45.161 21.725,44.736
NetL2_1 on F.Cu "F.Cu-NetL2_1" (solid, remove dead copper, pour order 14): 25.625,40.241 25.984,40.6 27.1,40.6 27.35,40.35 27.35,39.6 27.1,39.35 25.6,39.35 24.916,40.034 23.933,40.034 23.944,40.466 25.85,40.466
V_IN on F.Cu "F.Cu-V_IN" (solid, remove dead copper, pour order 10): 21.675,29.675 21.675,36.775 22.15,37.25 22.525,37.25 22.525,28.925 22.85,28.6 35.85,28.6 36.6,27.85 36.6,25.85 35.85,25.1 20.85,25.1 20.1,25.85 20.1,28.1
NetC2_1 on F.Cu "F.Cu-NetC2_1" (solid, remove dead copper, pour order 15): 27.1,39.1 27.35,38.85 27.35,38.35 27.1,38.1 25.375,38.1 23.925,39.55 23.925,39.95 24.875,39.95 25.725,39.1
NetBT2_N on F.Cu "F.Cu-NetBT2_N-1" (solid, remove dead copper, pour order 2): 5.85,26.85 9.6,26.85 9.6,25.85 23.85,11.6 23.85,4.85 20.1,4.85 20.1,10.1 5.85,24.35
NetL1_1 on F.Cu "F.Cu-NetL1_1" (solid, remove dead copper, pour order 16): 23.261,38.264 24.925,36.6 26.725,36.6 24.125,39.2 23.256,39.2
NetBT1_N on F.Cu "F.Cu-NetBT1_N" (solid, remove dead copper, pour order 4): 14.85,26.85 18.6,26.85 18.6,25.85 32.85,11.6 32.85,4.85 29.1,4.85 29.1,10.1 14.85,24.35
NetBT2_N on F.Cu "F.Cu-NetBT2_N" (solid, remove dead copper, pour order 1): 24.85,4.35 24.35,4.85 24.35,5.6 24.6,5.85 25.85,5.85 26.35,5.35 26.35,4.85 25.85,4.35 25.85,3.6 25.6,3.35 25.1,3.35 24.85,3.6
NetC1_1 on F.Cu "F.Cu-NetC1_1" (solid, remove dead copper, pour order 18): 22.675,34.775 22.85,34.6 23.6,34.6 25.1,33.1 25.962,33.963 23.925,36 23.925,37.469 23.121,38.273 23.121,39.175 22.675,39.175

## Other copper
F.SilkS:
  text "GND" at 25.914,51.333 h0.75 r90
  text "STAT1" at 20.789,50.646 h0.75 r90
  text "STAT0" at 23.365,50.639 h0.75 r90
  text "LVOUT" at 18.339,50.592 h0.75 r90
  text "VBATT" at 13.162,50.481 h0.75 r90
  text "HVOUT" at 15.739,50.485 h0.75 r90
  text "VBATT" at 7.056,48.859 h0.5
  text "GND" at 6.732,46.458 h0.5
  text "L0_LO" at 34.32,45.578 h0.5
  text "L0_HI" at 26.85,45.543 h0.5
  text "L1_HI" at 26.85,43.544 h0.5
  text "L1_LO" at 34.395,43.519 h0.5
  text "ENHV" at 11.05,41.66 h0.5
  text "VBUCK" at 33.516,41.611 h0.75
  text "nENHV" at 14.75,40.86 h0.5
  text "VBOOST" at 33.36,39.336 h0.75
  text "ENLV" at 13.025,38.885 h0.5
  text "nENLV" at 15.75,38.835 h0.5
  text "BUFSRC" at 33.297,37.436 h0.75
  text "VIN" at 34.179,34.089 h0.75
  text "GND" at 34.058,31.536 h0.75
  text "JLCJLCJLCJLC" at 32.542,22.15 h1 r90
  text "GND_BT1" at 30.553,1.276 h0.75
  text "GND_BT2" at 24.501,1.251 h0.75

## Text inside footprints (layer, text, board x,y; h text height)
L2: User.6 "Land Pattern Adapted for Flow Soldering" at 26.275,39.85 h0.05 r90